# Altium PCB PCB1.PcbDoc
Units mm, origin at the board's own origin, x right, y up, seen from the top; angles counter-clockwise.
Board outline 44.07 x 44.07 mm, 2 copper layers (Top Layer, Bottom Layer); 13 components, 12 nets, 62 pads, 0 vias.
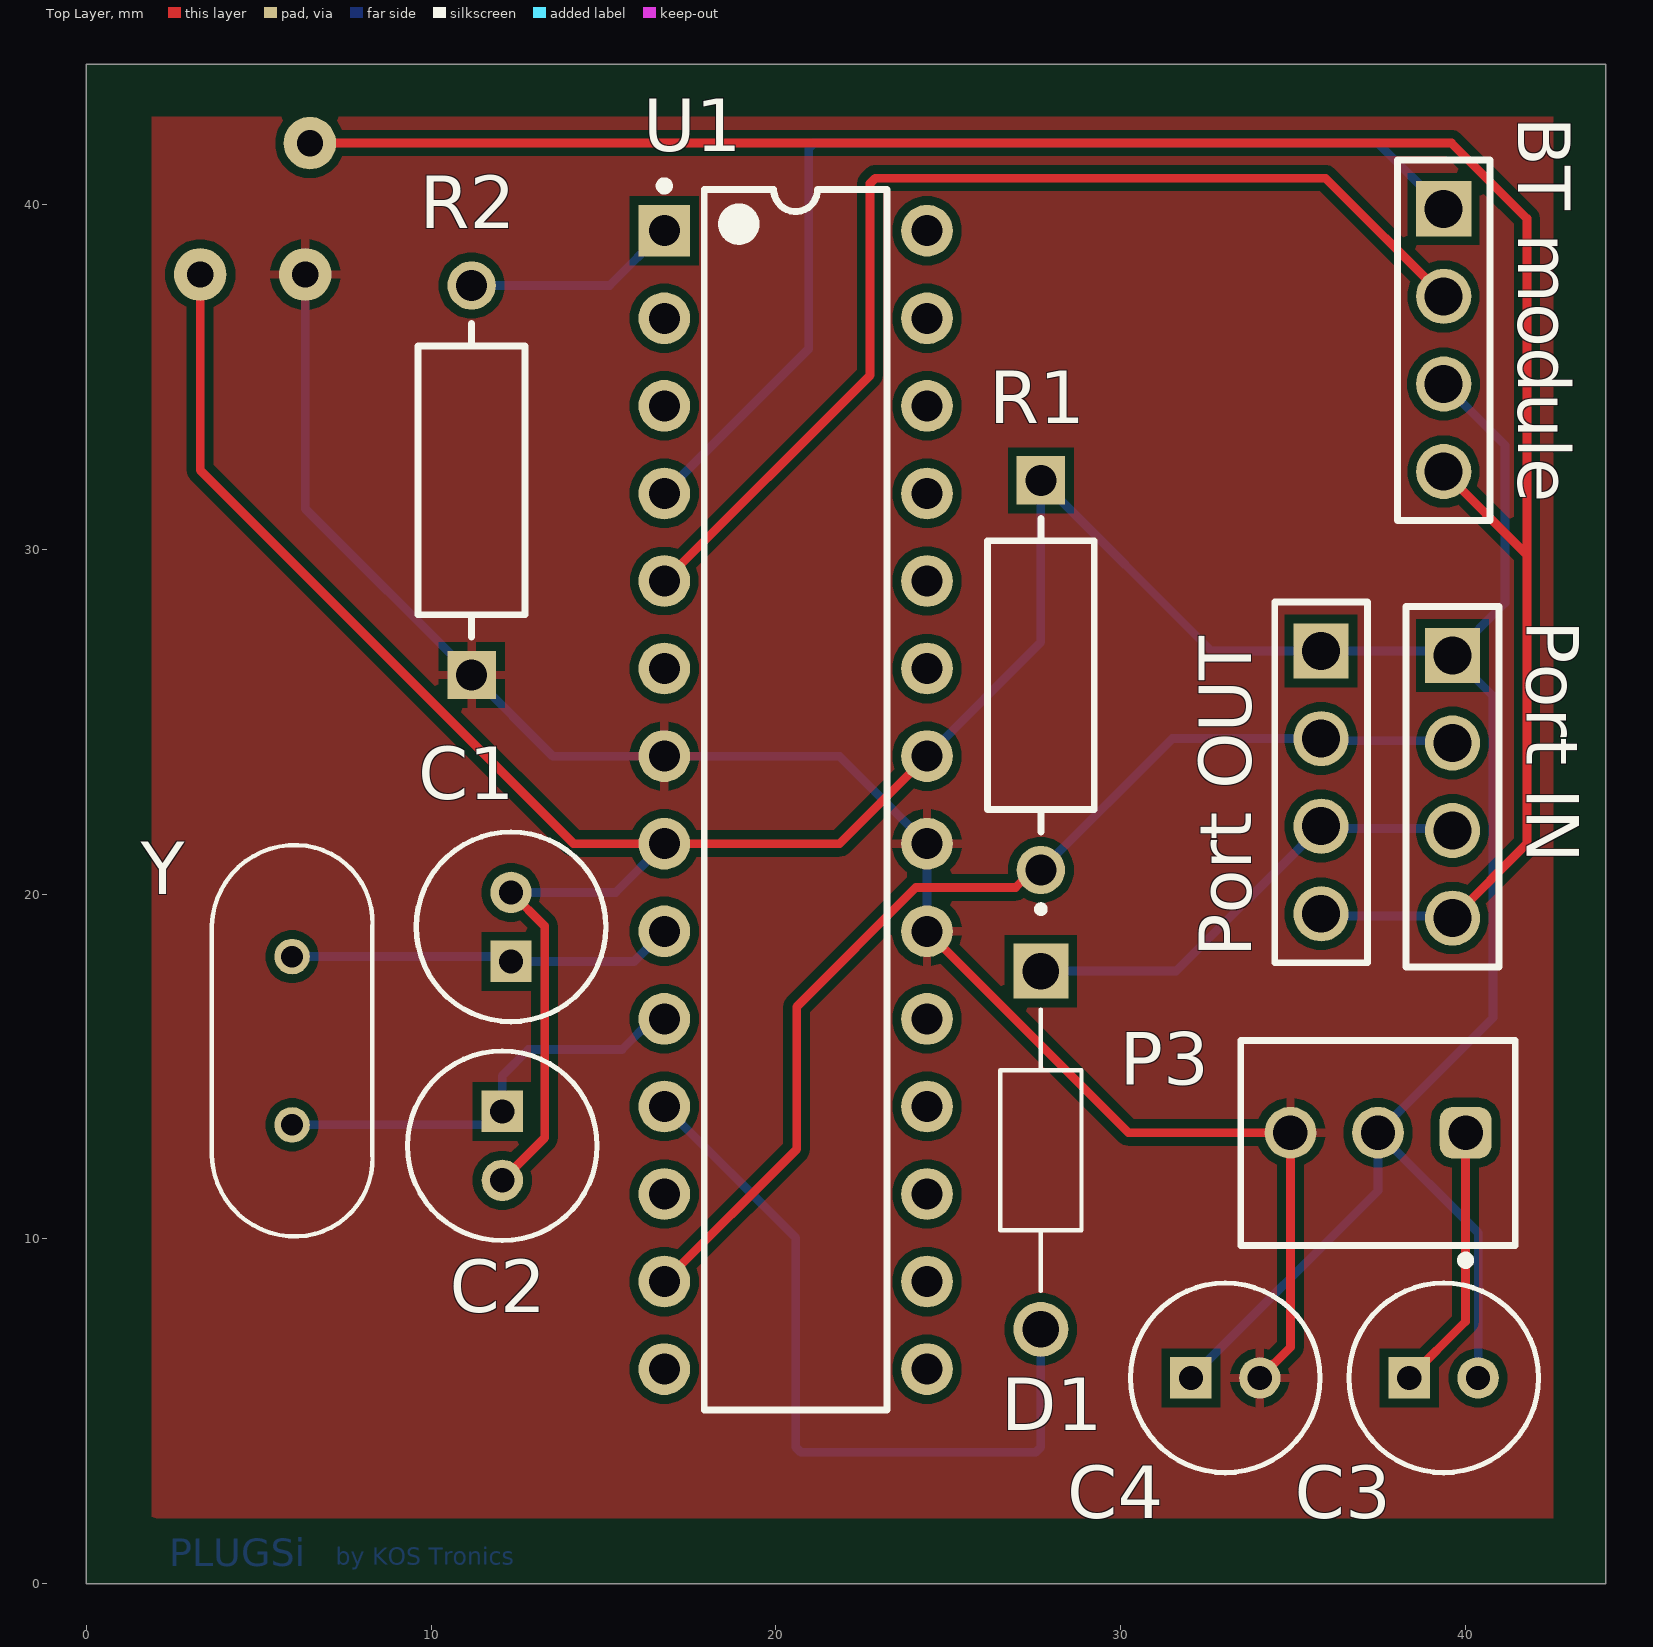
[diagram p0: Top Layer view]
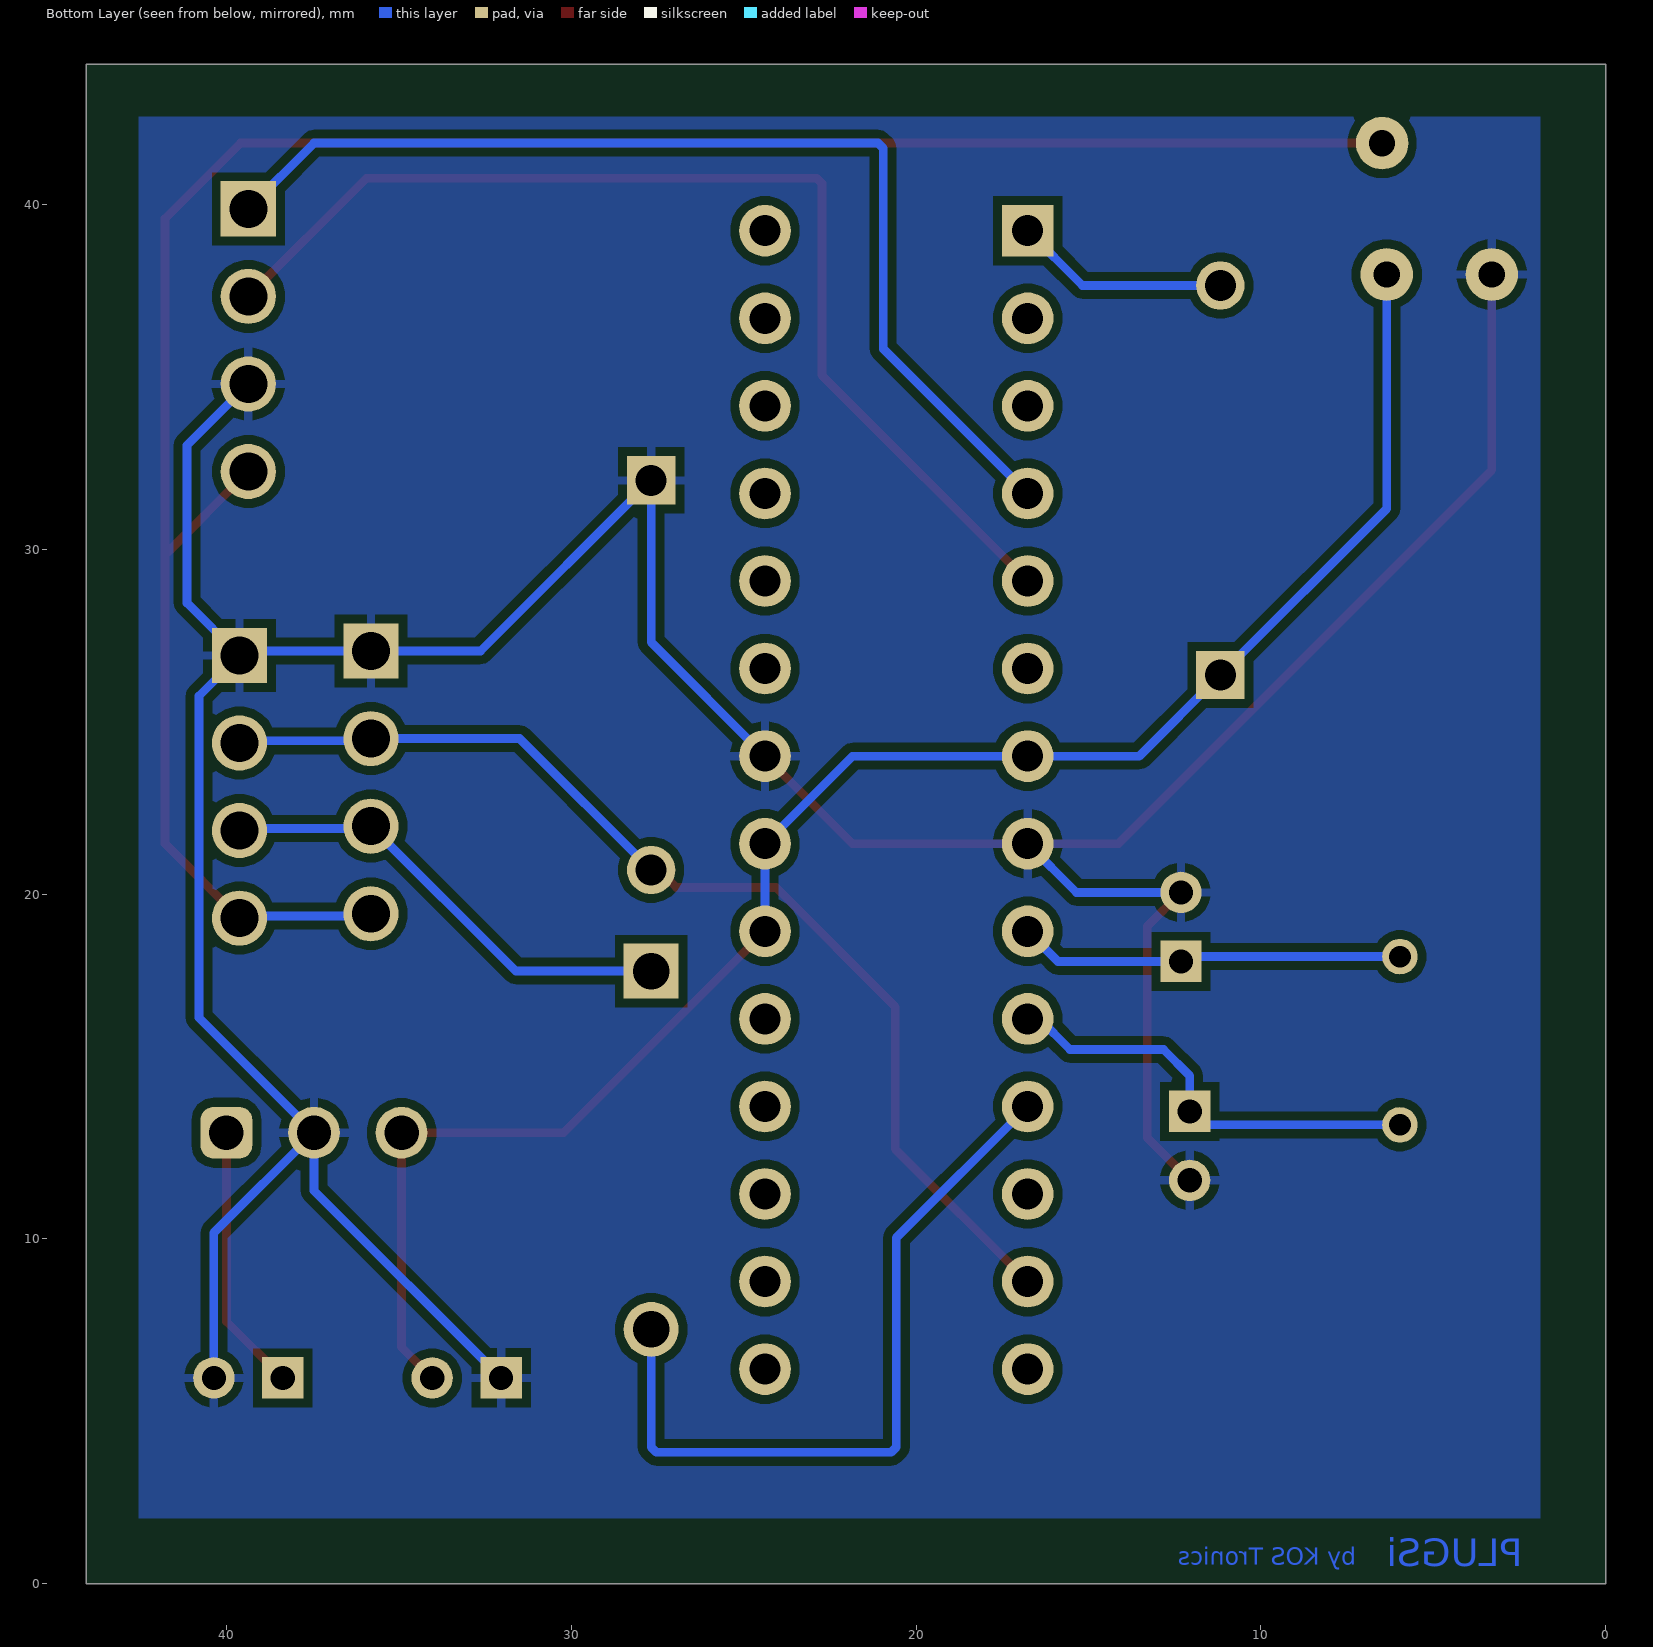
[diagram p1: Bottom Layer view, seen from below]
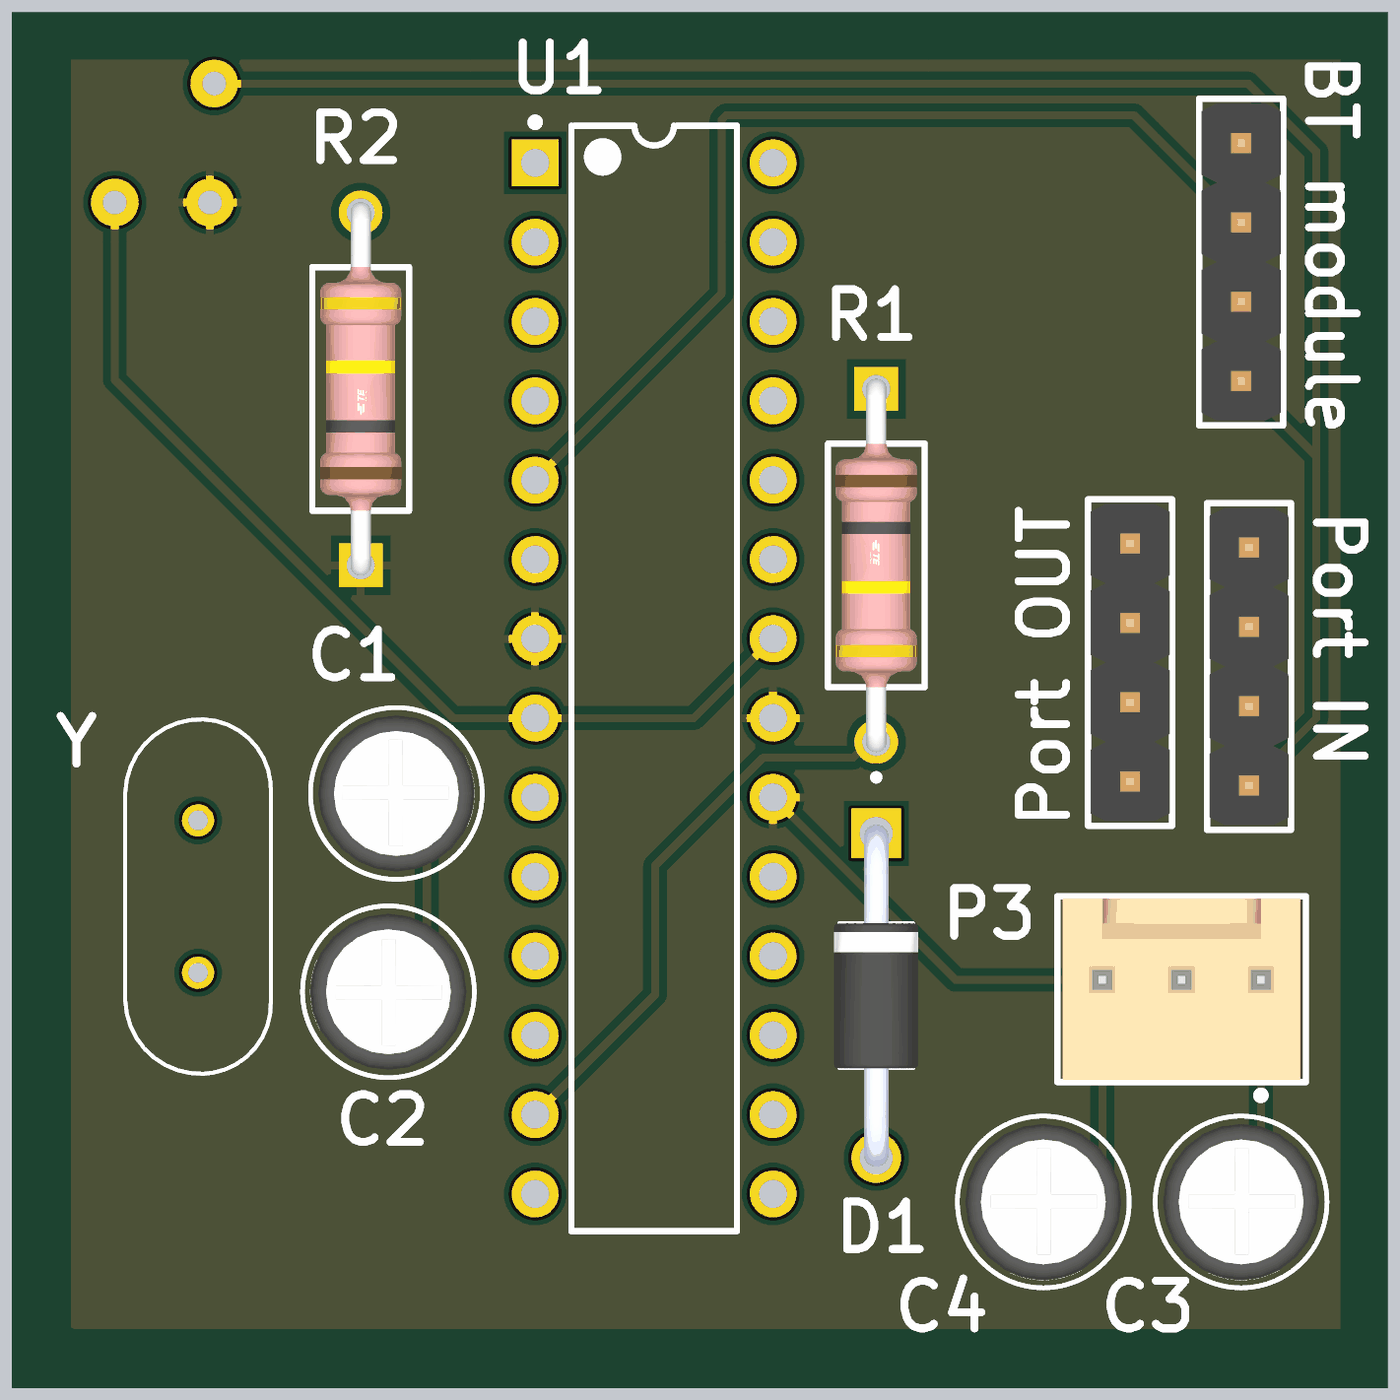
[diagram p2: 3D render of the assembled board from above, using the file's embedded part models]

## Layer stack, top to bottom
Top Solder: solder mask 0.0102, Solder Resist, Dk 3.5
Top Layer: signal copper 0.0356
Dielectric 1: dielectric 0.32, FR-4, Dk 4.8
Bottom Layer: signal copper 0.0356
Bottom Solder: solder mask 0.0102, Solder Resist, Dk 3.5

## Board outline
0,0 44.069,0 44.069,44.069 0,44.069

## Design rules (kind name [scope] priority, off if disabled: settings)
Clearance [All] p1: gap=0.25 ignorepadtopadclearanceinfootprint=FALSE
PolygonConnect [All] p1: connectstyle=Relief reliefconductorwidth=0.254 reliefentries=4 polygonreliefangle="90 Angle" airgapwidth=0.254
RoutingVias [All] p1: holewidth=0.4 width=0.5 viastyle="Through Hole" minholewidth=0.4 minwidth=0.5 maxholewidth=0.4 maxwidth=0.5
SilkToSolderMaskClearance [IsPad] p1: minsilkscreentomaskgap=0.1 clearancetoexposedcopper=TRUE
SolderMaskExpansion [All] p1: expansion=0.102 istentingtop=FALSE
Width Width_1 [All] p1: maxlimit=0.254 minlimit=0.254 preferedwidth=0.254
Width WidthPow [(InNet('VCC') OR InNet('VCC2') OR InNet('GND'))] p2: maxlimit=0.6 minlimit=0.45 preferedwidth=0.5
29 further rules are at their usual default settings.

## Classes and differential pairs
component class Sheet1: "BT module" C1 C2 C3 D1 P3 "Port IN" "Port OUT" R1 R2 U1 Y

## Components (designator, comment, footprint, x,y, rotation, side; value= is the part's Value field where it differs from the comment)
"BT module" "61300411121" 61300411121 39.37,36.068 r270 top (schematic designator "bluetooth module")
C1 "ECA1CEN330" FP-RAD-TH-D_5_0_5-L_11_1-MFG 12.319,19.05 r90 top
C2 "ECA1CEN330" FP-RAD-TH-D_5_0_5-L_11_1-MFG 12.065,12.7 r270 top
C3 "ECA1CEN330" FP-RAD-TH-D_5_0_5-L_11_1-MFG 39.37,5.969 r0 top
C4 "ECA1CEN330" FP-RAD-TH-D_5_0_5-L_11_1-MFG 33.036,5.969 r0 top
D1 "1N5817-T" DIOAD1039W78L463D236 27.686,12.573 r270 top
P3 "61900311121" 61900311121 37.465,12.781 r0 top
"Port IN" "61300411121" 61300411121 39.624,23.114 r270 top
"Port OUT" "61300411121" 61300411121 35.814,23.241 r270 top
R1 "RR01J100KTB" FP-RR01-MFG 27.686,26.351 r270 top
R2 "RR01J100KTB" FP-RR01-MFG 11.176,32.004 r90 top
U1 "ATmega328-PU" 28P3 20.574,22.733 r0 top
Y "ECS-240.0001-18-1X" XTAL_ECS-200-20-1X 5.969,15.748 r90 top

## Footprints (in the part's own frame and the unit in brackets; to place one, negate y for a bottom-side part, rotate by r counter-clockwise, add the part's x,y. Pads: shape width x height; smd on the part's side, far side on the other; paste and mask are expansions set on the pad)
28P3 [mm] "28-Pin Plastic Dual In-Line Package (PDIP)"
  rect 1.5x1.5 hole 0.9: 1(-3.81,16.51)
  round 1.5 hole 0.9: 2(-3.81,13.97) 3(-3.81,11.43) 4(-3.81,8.89) 5(-3.81,6.35) 6(-3.81,3.81) 7(-3.81,1.27) 8(-3.81,-1.27) 9(-3.81,-3.81) 10(-3.81,-6.35) 11(-3.81,-8.89) 12(-3.81,-11.43) 13(-3.81,-13.97) 14(-3.81,-16.51) 15(3.81,-16.51) 16(3.81,-13.97) 17(3.81,-11.43) 18(3.81,-8.89) 19(3.81,-6.35) 20(3.81,-3.81) 21(3.81,-1.27) 22(3.81,1.27) 23(3.81,3.81) 24(3.81,6.35) 25(3.81,8.89) 26(3.81,11.43) 27(3.81,13.97) 28(3.81,16.51)
  silkscreen extent -3.93,-17.7 2.65,17.93, body extent -3.6,-17.65 3.6,17.65, height 4.58
61300411121 [mm] "Pin Header, pitch 2.54 mm, THT, Vertical, single row, 4p"
  rect 1.6x1.6 hole 1.1: 1(-3.81,0)
  round 1.6 hole 1.1: 2(-1.27,0) 3(1.27,0) 4(3.81,0)
  silkscreen extent -5.23,-1.35 5.23,1.35, body extent -5.08,-1.27 5.08,1.27, height 8.57
61900311121 [mm] "2.54mm Male Locking Header, 3p"
  rrect50% 1.5x1.5 hole 1: 1(2.54,0.3)
  round 1.5 hole 1: 2(0,0.3) 3(-2.54,0.3)
  silkscreen extent -3.98,-3.52 3.98,2.98, body extent -3.81,-2.9 3.81,2.9, height 11.53
DIOAD1039W78L463D236 [mm]
  rect 1.59x1.59 / inner round 1.59 / far side rect 1.59x1.59 hole 1.06: 1(-5.197,0)
  round 1.59 hole 1.06: 2(5.197,0)
  silkscreen extent -7.09,-1.18 4.08,1.18, body extent -5.47,-1.35 5.47,1.35, height 2.69
FP-RAD-TH-D_5_0_5-L_11_1-MFG [mm]
  rect 1.2x1.2 hole 0.7 paste-1000 mask+0: 1(-1,0)
  round 1.2 hole 0.7 paste-1000 mask+0: 2(1,0)
  silkscreen extent -2.75,-2.75 2.75,2.75, body extent -2.85,-2.85 2.85,2.85, height 0.25
FP-RR01-MFG [mm]
  rect 1.4x1.4 hole 0.9 paste-1000 mask+0: 1(-5.65,0)
  round 1.4 hole 0.9 paste-1000 mask+0: 2(5.65,0)
  silkscreen extent -4.55,-1.55 4.55,1.55, body extent -6.45,-1.65 6.45,1.65, height 0.25
XTAL_ECS-200-20-1X [mm]
  round 1.03 hole 0.63: 1(-2.44,0) 2(2.44,0)
  silkscreen extent -5.68,-2.33 5.68,2.33

## Part data
"BT module" "Port IN" "Port OUT": library part CMP-1502-01064-1, "THT Vertical Pin Header WR-PHD, Pitch 2.54 mm, Single Row, 4 pins", Contact Resistance=20mOhm, Manufacturer="Wurth Elektronik", Operating Temperature=-40to105degC, Rated Current=3A, Withstanding Voltage=500VAC, Working Voltage=250VAC, Datasheet URL=https://katalog.we-online.de/em/datasheet/6130xx11121.pdf, Gender=Male, Manufacturer URL=http://www.we-online.de, Mounting Technology=THT, Orientation=Vertical, Package Reference=61300411121, Packaging=Bag, Part Number=61300411121, Pin Number=4, Pitch=2.54mm, Publisher=WurthElektronik, Row Number=Single
C1 C2 C3 C4: library part CMP-05427-001881-1, "Aluminum Electrolytic Capacitors (Radial Lead Type) 33uF ±20% 16V", Capacitance=33uF, Case/Package=Radial, Max Operating Temperature=105°C, Min Operating Temperature=-40°C, Package Quantity=200, Ripple Current=80mA, Tolerance=20%, Voltage Rating (DC)=16V, Lead Pitch=2mm, Lead/Base Style=Straight, Mount="Through Hole", Packaging="Ammo Pack", RoHS Compliant=Yes, Series=GA, Termination=Radial
D1: "Diode Schottky 20 V 1A Through Hole DO-41", Package="DO-41 Diodes Inc.", Availability="In Stock", Check_prices=https://www.snapeda.com/parts/1N5817-T/Diodes+Inc./view-part/?ref=eda, MF="Diodes Inc.", MP=1N5817-T, Price=None, Purchase-URL=https://pricing.snapeda.com/search/part/1N5817-T/?ref=eda, SnapEDA_Link=https://www.snapeda.com/parts/1N5817-T/Diodes+Inc./view-part/?ref=snap
P3: library part CMP-1502-00585-2, Color=Beige, Contact Resistance=20mΩ, Current Rating=3A, Flammability Rating="UL94 V-0", Insulation Resistance=1GΩ, Max Operating Temperature=105°C, Min Operating Temperature=-40°C, Operating Supply Voltage=250V, Connector Type="Male Pin", Contact Gender=Male, Contact Material=Copper, Contact Mating Length=7.493mm, Contact Plating=Tin, Fastening Type=Friction, Gender=Male, Height=12.5mm, Housing Material=Nylon, Lead Pitch=2.54mm, Length=7.62mm, Mount="Through Hole", NexarPartId=18818222, Number of Contacts=3, Number of Pins=3, Number of Positions=3, Number of Rows=1, Orientation=Vertical, Packaging=Bulk, Pitch=2.54mm, REACH SVHC=Unknown, RoHS=Compliant, Termination="Through Hole", Voltage Rating=250V, Width=7.66mm
R1 R2: library part CMP-03212-000008-1, "RES 100K OHM 5% 1W AXIAL", Case/Package=Metal, Max Operating Temperature=155°C, Min Operating Temperature=-55°C, Number of Resistors=1, Package Quantity=5000, Power Rating=1W, Resistance=100kR, Resistor Type="Power resistor", Temperature Coefficient=300ppm/°C, Tolerance=5%, Voltage Rating=350V, Diameter=2.6mm, ELV=Compliant, Length=6.8mm, Mount=Axial, Number of Terminations=2, Packaging="Ammo Pack", RoHS Compliant=Yes, Series=RR, Termination=Axial
U1: library part CMP-0095-00015-2, "8-bit AVR Microcontroller, 32KB Flash, 1KB EEPROM, 2KB SRAM, 28-pin PDIP, Industrial Grade (-40°C to 85°C)", ComponentLink1Description="Manufacturer URL", ComponentLink1URL=http://www.atmel.com/, ComponentLink2Description="ATmega48A/48PA/88A/88PA/168A/168PA/328/328P Datasheet", ComponentLink2URL=http://www.atmel.com/dyn/resources/prod_documents/8271.pdf, ComponentLink3Description="ATmega48A/48PA/88A/88PA/168A/168PA/328/328P Summary", ComponentLink3URL=http://www.atmel.com/dyn/resources/prod_documents/8271S.pdf, DatasheetVersion="revD, May-2011", PackageDescription="28-lead (0.300\"/7.62mm Wide) Plastic Dual Inline Package (PDIP)", PackageReference=28P3, PackageVersion="revB, Sep-2001", RevisionNote="DatasheetVersion updated. URLs added."
Y: "Crystals / Oscillators / Resonators 24.00014MHz 18pF", Package="HC49/U ECS International", Availability=Unavailable, MF="ECS International", MP=ECS-240.0001-18-1X, Price=None, SnapEDA_Link=https://www.snapeda.com/parts/ECS-240.0001-18-1X/ECS%20International/view-part/259232/?ref=snap

## Free pads (board coordinates)
  round 1.524 hole 0.762: 6(3.302,37.973) 7(6.35,37.973) 8(6.486,41.783)

## Nets (pads, with @x,y where several pads share a name; then routed paths per layer and width w, separated by ;. In a path a pad name is that pad's centre, name@x,y a point inside that pad or via, vN(x,y) a via of type N, cw(c..) or ccw(c..) an arc to the next point about the centre after c; other vN are vias at no path point)
CMD: D1.2 U1.11 | length 22.1
  Bottom Layer w0.254: U1.11 20.574,10.033 20.574,3.959 20.723,3.81 27.537,3.81 27.686,3.959 D1.2
GND: "BT module.3" "Port IN.1" "Port OUT.1" C1.2 C2.2 C3.2 C4.1 P3.2 pad.6 R1.1 U1.8 U1.22 | length 112.6
  Top Layer w0.254: pad.6 3.302,32.295 14.134,21.463 U1.8 21.844,21.463 U1.22 ; C2.2 13.296,12.931 13.296,19.073 C1.2
  Bottom Layer w0.254: C1.2 15.351,20.05 U1.8 ; U1.22 27.686,27.305 R1.1 32.636,27.051 35.814,27.051 39.497,27.051 39.624,26.924 ; C4.1 37.465,11.398 P3.2 ; 39.37,34.798 41.148,33.02 41.148,28.448 39.624,26.924 ; C3.2 40.37,10.176 P3.2 ; P3.2 40.801,16.417 40.801,25.747 39.624,26.924
"Netbluetooth module_1": "BT module.1" U1.4 | length 31
  Bottom Layer w0.254: U1.4 20.955,35.814 20.955,41.634 21.104,41.783 37.465,41.783 39.37,39.878
"Netbluetooth module_2": "BT module.2" U1.5 | length 32.1
  Top Layer w0.254: U1.5 22.733,35.052 22.733,40.618 22.882,40.767 35.941,40.767 39.37,37.338
NetC1_1: C1.1 U1.9 Y.2 | length 11.2
  Bottom Layer w0.254: Y.2 12.181,18.188 C1.1 15.891,18.05 U1.9
NetC2_1: C2.1 U1.10 Y.1 | length 12.7
  Bottom Layer w0.254: Y.1 11.673,13.308 C2.1 12.065,14.732 12.827,15.494 15.538,15.494 16.427,16.383 U1.10
NetC3_1: C3.1 P3.1 | length 7.8
  Top Layer w0.254: C3.1 40.005,7.604 P3.1
NetD1_1: "Port IN.3" "Port OUT.3" D1.1 | length 13.7
  Bottom Layer w0.254: D1.1 31.613,17.77 35.814,21.971 35.877,21.907 39.56,21.907 39.624,21.844
NetR2_2: R2.2 U1.1 | length 6.2
  Bottom Layer w0.254: R2.2 15.175,37.654 U1.1
Status: "Port IN.2" "Port OUT.2" R1.2 U1.13 | length 31.9
  Top Layer w0.254: U1.13 20.603,12.602 20.603,16.736 24.06,20.193 26.951,20.193 27.459,20.701 R1.2
  Bottom Layer w0.254: R1.2 31.496,24.511 35.814,24.511 35.877,24.447 39.56,24.447 39.624,24.384
VCC: C4.2 P3.3 pad.7 R2.1 U1.7 U1.20 U1.21 | length 51.8
  Top Layer w0.254: U1.20 30.226,13.081 P3.3 34.925,6.858 C4.2
  Bottom Layer w0.254: pad.7 6.35,31.18 R2.1 13.527,24.003 U1.7 21.844,24.003 U1.21 U1.20
VCC2: "BT module.4" "Port IN.4" "Port OUT.4" pad.8 | length 64.7
  Top Layer w0.254: pad.8 39.598,41.783 41.783,39.598 41.783,29.845 ; 39.37,32.258 41.783,29.845 ; 39.624,19.304 41.783,21.463 41.783,29.845
  Bottom Layer w0.254: 35.814,19.431 35.877,19.367 39.56,19.367 39.624,19.304
pads on no net: U1.2 U1.3 U1.6 U1.12 U1.14 U1.15 U1.16 U1.17 U1.18 U1.19 U1.23 U1.24 U1.25 U1.26 U1.27 U1.28

## Polygon pours and split planes (outlines as drawn)
VCC on Top Layer "VCC_L01_P004" (solid, remove dead copper, pour order 4): 1.905,42.545 1.905,1.778 2.032,1.905 42.545,1.905 42.545,42.545
GND on Bottom Layer "GND_L02_P005" (solid, remove dead copper, pour order 5): 1.905,42.545 42.545,42.545 42.545,1.905 1.905,1.905

## Other copper
Bottom Layer:
  text "by KOS Tronics" at 7.239,0.548 h0.5
  text "PLUGSi" at 2.413,0.508 h0.8

## Silkscreen, mask and mechanical layers (free items; w line width, h text height)
Mechanical 1:
  lines w0.254: 0,0.127 0,44.069 44.069,44.069 44.069,0 0.127,0 0,0.127